# Altium PCB GMAX0505_2518_MB.PcbDoc
Units mm, origin at the board's own origin, x right, y up, seen from the top; angles counter-clockwise.
Board outline 185 x 150 mm, 2 copper layers (Top Layer, Bottom Layer); 120 components, 45 nets, 510 pads, 505 vias.
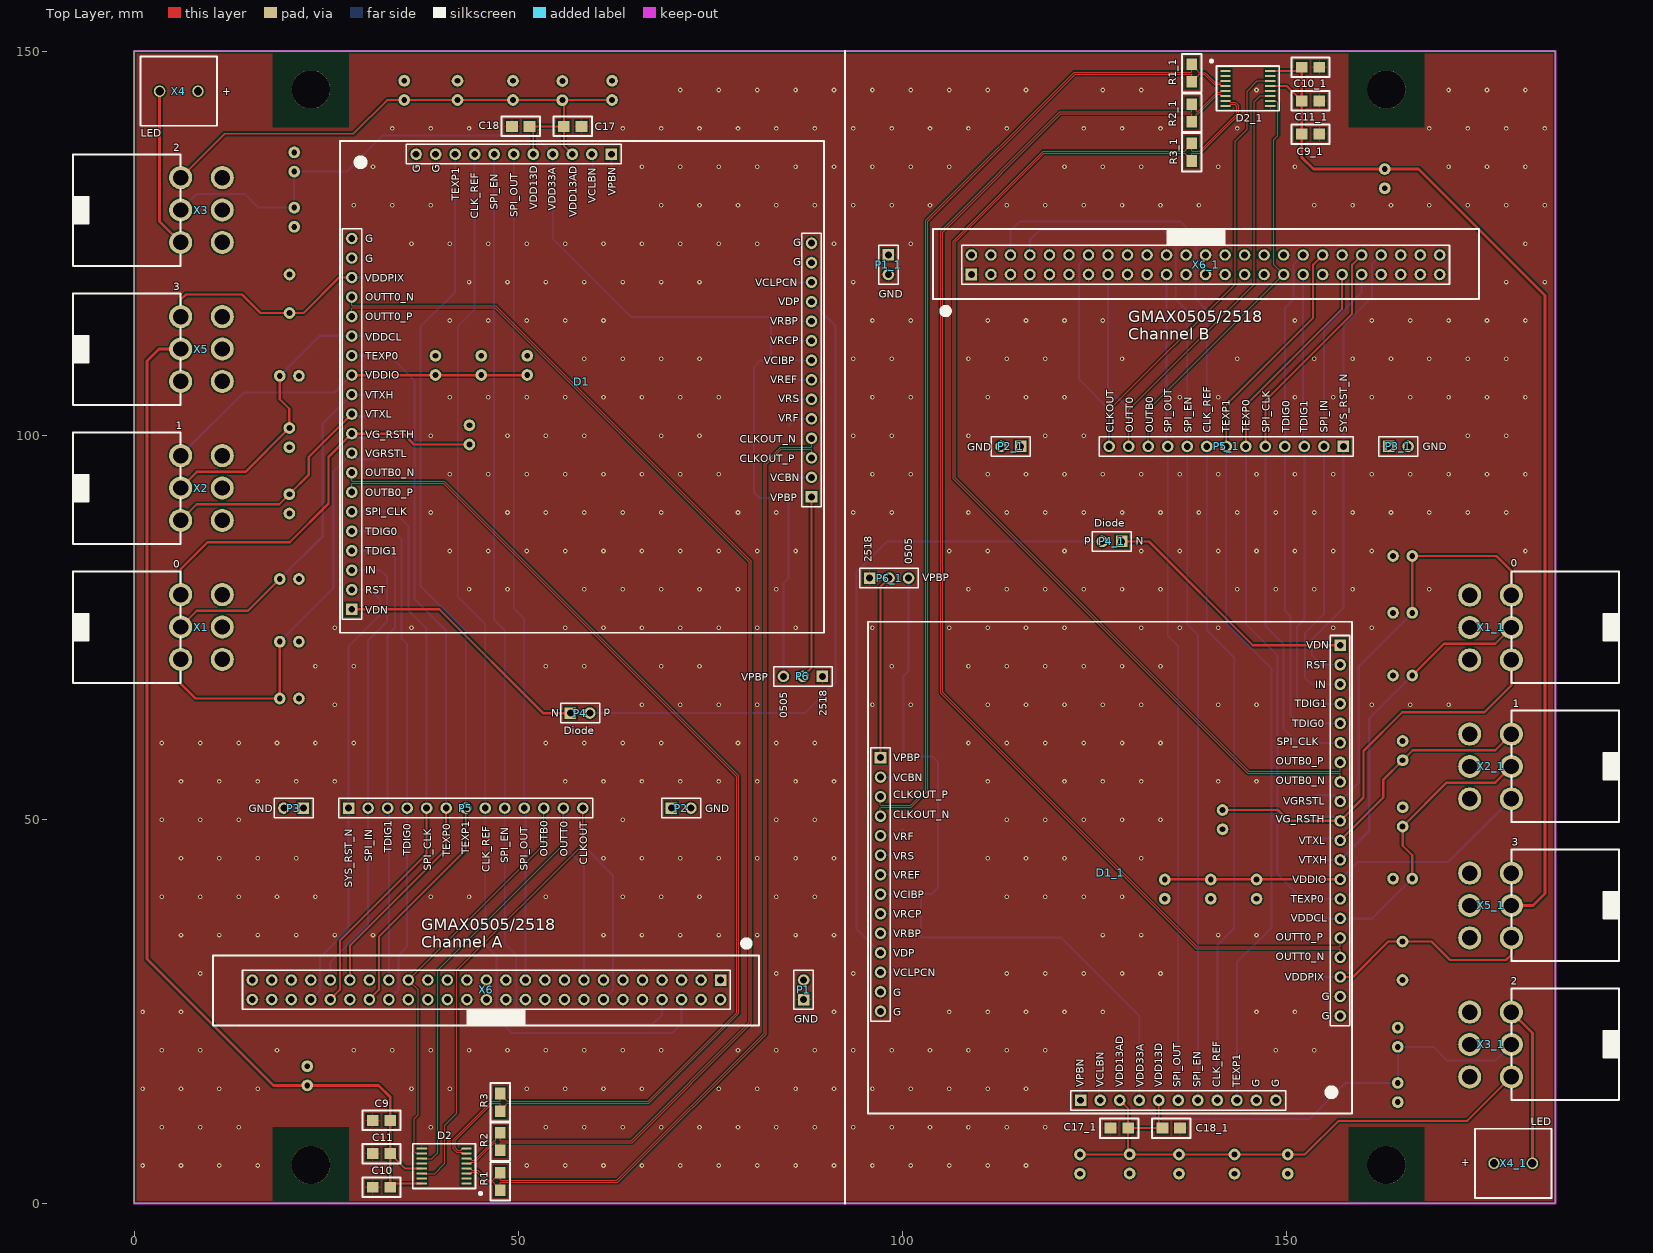
[diagram p0: Top Layer view]
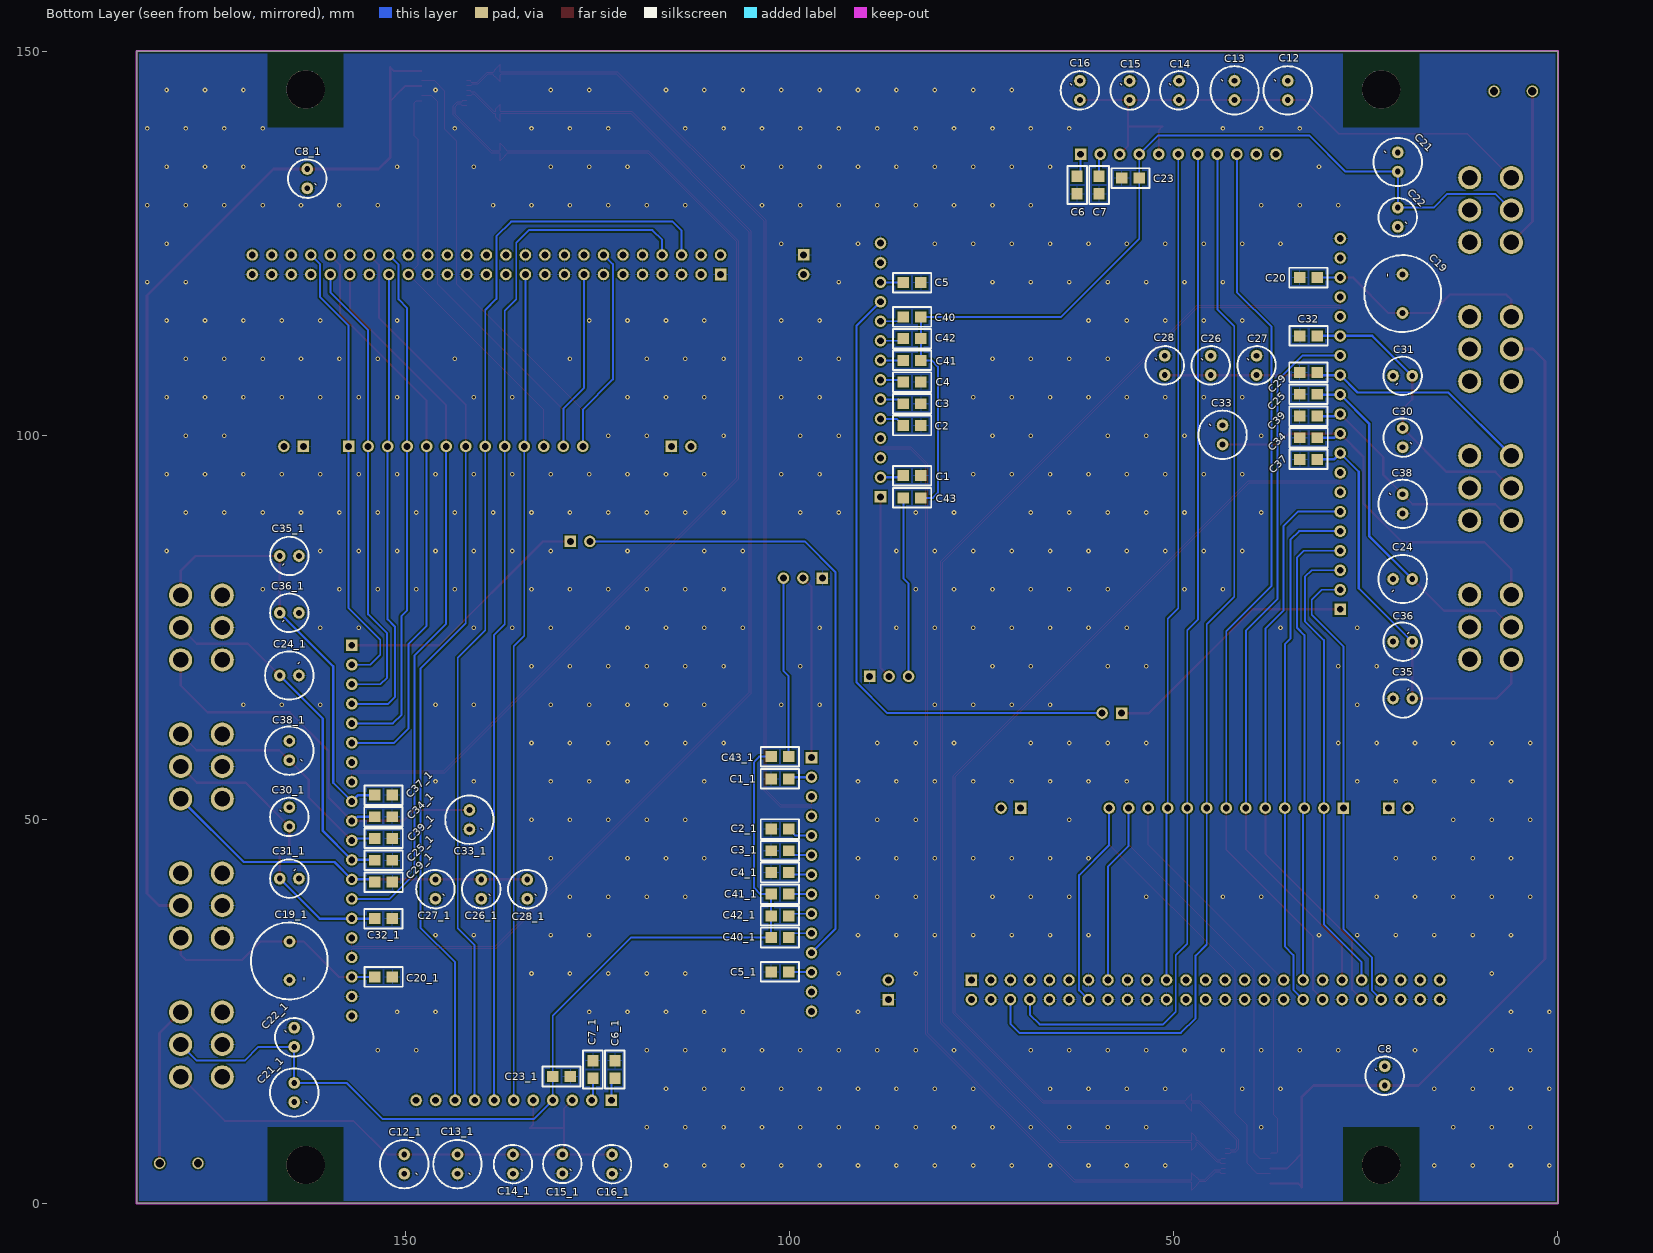
[diagram p1: Bottom Layer view, seen from below]

## Layer stack, top to bottom
Top Solder: solder mask 0.0102, Solder Resist, Dk 3.5
Top Layer: signal copper 0.0356
Dielectric 1: dielectric 0.32, FR-4, Dk 4.8
Bottom Layer: signal copper 0.0356
Bottom Solder: solder mask 0.0102, Solder Resist, Dk 3.5

## Board outline
0,0 0,150 185,150 185,0

## Design rules (kind name [scope] priority, off if disabled: settings)
BoardOutlineClearance [OnLayer('Multi-Layer')] p1: gap=0.254 ignorepadtopadclearanceinfootprint=FALSE except(0: Arc-SplitContinuation Track-SplitContinuation SMDPad-SplitContinuation THPad-SplitContinuation Via-SplitContinuation Fill-SplitContinuation Poly-SplitContinuation Region-SplitContinuation Text-SplitContinuation; 0.4: Arc-OutlineEdge Track-OutlineEdge SMDPad-OutlineEdge THPad-OutlineEdge Via-OutlineEdge Fill-OutlineEdge Poly-OutlineEdge Region-OutlineEdge Text-OutlineEdge)
Clearance [All] p1: gap=0.125 ignorepadtopadclearanceinfootprint=FALSE except(0.2: Arc-Fill Arc-Poly Track-Fill Track-Poly SMDPad-Fill SMDPad-Poly THPad-Fill THPad-Poly Via-Fill Via-Poly Fill-Fill Fill-Poly Poly-Poly Poly-Region Poly-Text; 0.25: Arc-Hole Track-Hole SMDPad-Hole THPad-Hole Via-Hole Fill-Hole Poly-Hole Region-Hole Text-Hole) // Standart
DiffPairsRouting [All] p1: maxlimit=0.254 minlimit=0.127 mostfreqgap=0.13 toplayer_minwidth=0.127 toplayer_maxwidth=0.381 toplayer_prefwidth=0.37 bottomlayer_minwidth=0.127 bottomlayer_maxwidth=0.381 bottomlayer_prefwidth=0.37 maxuncoupledlength=12.7
HoleSize [All] p1: absolutevalues=TRUE maxlimit=5 minlimit=0.3 maxpercent=80.000 minpercent=20.000
MinimumSolderMaskSliver [All] p1: minsoldermaskwidth=0.1
PlaneClearance "PlaneClearance-1 1/2 Oz" [All] p1: clearance=0.2 // Standart
PlaneConnect "TermalConnect-1 1/2 Oz" [All] p1: planeconnectstyle=Relief reliefexpansion=0.2 reliefentries=4 reliefconductorwidth=0.2 reliefairgap=0.2 // Standart
PolygonConnect "PolygonConnect-1 1/2 Oz" [All] p1: thpad.connectstyle=Relief thpad.reliefconductorwidth=0.15 thpad.reliefentries=4 thpad.polygonreliefangle="90 Angle" thpad.airgapwidth=0.2 smdpad.connectstyle=Relief smdpad.reliefconductorwidth=0.2 smdpad.reliefentries=4 smdpad.polygonreliefangle="90 Angle" smdpad.airgapwidth=0.2 via.connectstyle=Direct via.reliefconductorwidth=0.254 via.reliefentries=4 via.polygonreliefangle="90 Angle" via.airgapwidth=0.254 // Standart
RoutingVias [All] p1: holewidth=0.3 width=1.27 viastyle="Through Hole" minholewidth=0.3 minwidth=0.6 maxholewidth=0.711 maxwidth=1.27
SilkToSilkClearance [All] p1: silktosilkclearance=0
SilkToSolderMaskClearance [IsPad] p1: minsilkscreentomaskgap=0 clearancetoexposedcopper=TRUE
SolderMaskExpansion [All] p1: expansion=0.102 istentingtop=FALSE
UnRoutedNet [All] p1: checkbadconnections=TRUE
Width [All] p1: maxlimit=2.5 minlimit=0.125 preferedwidth=0.37
22 further rules are at their usual default settings.

## Classes and differential pairs
component class Sheet1_GMAX0505_2518_MB: C1 C2 C3 C4 C5 C6 C7 C8 C9 C10 C11 C12 C13 C14 C15 C16 C17 C18 C19 C20 C21 C22 C23 C24 C25 C26 C27 C28 C29 C30 C31 C32 C33 C34 C35 C36 C37 C38 C39 C40 C41 C42 C43 D1 D2 P1 P2 P3 P4 P6 R1 R2 X1 X2 X3 X4 X5 X6
differential pair OUTT0: +OUTT0_P -OUTT0_N
differential pair OUTB0: +OUTB0_P -OUTB0_N
differential pair CLKOUT: +CLKOUT_P -CLKOUT_N

## Components (designator, comment, footprint, x,y, rotation, side; value= is the part's Value field where it differs from the comment)
C1 "0,1 мкФ" CAP_SMALL 86.556,93.472 r180 bottom
C1_1 "0,1 мкФ" CAP_SMALL 98.75,56.532 r0 bottom (schematic designator C1)
C2 "0,1 мкФ" CAP_SMALL 86.556,100 r180 bottom
C2_1 "0,1 мкФ" CAP_SMALL 98.75,50.004 r0 bottom (schematic designator C2)
C3 "0,1 мкФ" CAP_SMALL 86.556,102.824 r180 bottom
C3_1 "0,1 мкФ" CAP_SMALL 98.75,47.18 r0 bottom (schematic designator C3)
C4 "0,1 мкФ" CAP_SMALL 86.556,105.649 r180 bottom
C4_1 "0,1 мкФ" CAP_SMALL 98.75,44.355 r0 bottom (schematic designator C4)
C5 "0,1 мкФ" CAP_SMALL 86.556,118.593 r180 bottom
C5_1 "0,1 мкФ" CAP_SMALL 98.75,31.411 r0 bottom (schematic designator C5)
C6 "0,1 мкФ" CAP_SMALL 63.83,135.07 r270 bottom
C6_1 "0,1 мкФ" CAP_SMALL 121.476,14.934 r90 bottom (schematic designator C6)
C7 "0,1 мкФ" CAP_SMALL 60.985,135.07 r270 bottom
C7_1 "0,1 мкФ" CAP_SMALL 124.321,14.934 r90 bottom (schematic designator C7)
C8 "22 мкФ" Cap_0511_electrolitic 22.53,16.612 r90 bottom
C8_1 "22 мкФ" Cap_0511_electrolitic 162.776,133.392 r270 bottom (schematic designator C8)
C9 "0,1 мкФ" CAP_SMALL 29.675,9.55 r0 top
C9_1 "0,1 мкФ" CAP_SMALL 155.631,140.453 r180 top (schematic designator C9)
C10 "0,01 мкФ" CAP_SMALL 29.675,0.838 r0 top
C10_1 "0,01 мкФ" CAP_SMALL 155.631,149.166 r180 top (schematic designator C10)
C11 "0,01 мкФ" CAP_SMALL 29.675,5.207 r0 top
C11_1 "0,01 мкФ" CAP_SMALL 155.631,144.797 r180 top (schematic designator C11)
C12 "100 мкФ" Cap_0612_electrolitic 35.154,144.882 r90 bottom
C12_1 "100 мкФ" Cap_0612_electrolitic 150.152,5.122 r270 bottom (schematic designator C12)
C13 "100 мкФ" Cap_0612_electrolitic 42.079,144.882 r90 bottom
C13_1 "100 мкФ" Cap_0612_electrolitic 143.227,5.122 r270 bottom (schematic designator C13)
C14 "22 мкФ" Cap_0511_electrolitic 49.301,144.882 r90 bottom
C14_1 "22 мкФ" Cap_0511_electrolitic 136.005,5.122 r270 bottom (schematic designator C14)
C15 "22 мкФ" Cap_0511_electrolitic 55.728,144.862 r90 bottom
C15_1 "22 мкФ" Cap_0511_electrolitic 129.578,5.142 r270 bottom (schematic designator C15)
C16 "22 мкФ" Cap_0511_electrolitic 62.205,144.882 r90 bottom
C16_1 "22 мкФ" Cap_0511_electrolitic 123.101,5.122 r270 bottom (schematic designator C16)
C17 "0,1 мкФ" CAP_SMALL 54.567,138.938 r0 top
C17_1 "0,1 мкФ" CAP_SMALL 130.739,11.066 r180 top (schematic designator C17)
C18 "0,1 мкФ" CAP_SMALL 52.825,141.478 r180 top
C18_1 "0,1 мкФ" CAP_SMALL 132.481,8.526 r0 top (schematic designator C18)
C19 "330 мкФ" Cap_1013_electrolitic 20.218,118.415 r90 bottom
C19_1 "330 мкФ" Cap_1013_electrolitic 165.088,31.589 r270 bottom (schematic designator C19)
C20 "0,1 мкФ" CAP_SMALL 29.954,121.793 r0 bottom
C20_1 "0,1 мкФ" CAP_SMALL 155.352,28.211 r180 bottom (schematic designator C20)
C21 "100 мкФ" Cap_0612_electrolitic 20.828,135.565 r90 bottom
C21_1 "100 мкФ" Cap_0612_electrolitic 164.478,14.439 r270 bottom (schematic designator C21)
C22 "10 мкФ" Cap_0511_electrolitic 20.828,128.372 r270 bottom
C22_1 "10 мкФ" Cap_0511_electrolitic 164.478,21.632 r90 bottom (schematic designator C22)
C23 "0,1 мкФ" CAP_SMALL 53.119,134.747 r0 bottom
C23_1 "0,1 мкФ" CAP_SMALL 132.187,15.257 r180 bottom (schematic designator C23)
C24 "100 мкФ" Cap_0612_electrolitic 20.193,81.28 r0 bottom
C24_1 "100 мкФ" Cap_0612_electrolitic 165.113,68.724 r180 bottom (schematic designator C24)
C25 "0,1 мкФ" CAP_SMALL 29.954,106.604 r0 bottom
C25_1 "0,1 мкФ" CAP_SMALL 155.352,43.4 r180 bottom (schematic designator C25)
C26 "22 мкФ" Cap_0511_electrolitic 45.182,109.093 r90 bottom
C26_1 "22 мкФ" Cap_0511_electrolitic 140.124,40.911 r270 bottom (schematic designator C26)
C27 "22 мкФ" Cap_0511_electrolitic 39.209,109.093 r90 bottom
C27_1 "22 мкФ" Cap_0511_electrolitic 146.097,40.911 r270 bottom (schematic designator C27)
C28 "22 мкФ" Cap_0511_electrolitic 51.156,109.093 r90 bottom
C28_1 "22 мкФ" Cap_0511_electrolitic 134.15,40.911 r270 bottom (schematic designator C28)
C29 "0,1 мкФ" CAP_SMALL 29.954,109.449 r0 bottom
C29_1 "0,1 мкФ" CAP_SMALL 155.352,40.555 r180 bottom (schematic designator C29)
C30 "22 мкФ" Cap_0511_electrolitic 20.193,99.69 r270 bottom
C30_1 "22 мкФ" Cap_0511_electrolitic 165.113,50.314 r90 bottom (schematic designator C30)
C31 "22 мкФ" Cap_0511_electrolitic 20.193,107.721 r0 bottom
C31_1 "22 мкФ" Cap_0511_electrolitic 165.113,42.282 r180 bottom (schematic designator C31)
C32 "0,1 мкФ" CAP_SMALL 34.943,111.658 r180 bottom
C32_1 "0,1 мкФ" CAP_SMALL 150.363,38.345 r0 bottom (schematic designator C32)
C33 "100 мкФ" Cap_0612_electrolitic 43.637,100.045 r90 bottom
C33_1 "100 мкФ" Cap_0612_electrolitic 141.669,49.959 r270 bottom (schematic designator C33)
C34 "0,1 мкФ" CAP_SMALL 29.929,100.94 r0 bottom
C34_1 "0,1 мкФ" CAP_SMALL 155.377,49.064 r180 bottom (schematic designator C34)
C35 "22 мкФ" Cap_0511_electrolitic 20.193,65.723 r180 bottom
C35_1 "22 мкФ" Cap_0511_electrolitic 165.113,84.281 r0 bottom (schematic designator C35)
C36 "22 мкФ" Cap_0511_electrolitic 20.193,73.127 r180 bottom
C36_1 "22 мкФ" Cap_0511_electrolitic 165.113,76.877 r0 bottom (schematic designator C36)
C37 "0,1 мкФ" CAP_SMALL 34.95,95.58 r180 bottom
C37_1 "0,1 мкФ" CAP_SMALL 150.356,54.424 r0 bottom (schematic designator C37)
C38 "100 мкФ" Cap_0612_electrolitic 20.193,91.059 r90 bottom
C38_1 "100 мкФ" Cap_0612_electrolitic 165.113,58.945 r270 bottom (schematic designator C38)
C39 "0,1 мкФ" CAP_SMALL 29.954,103.759 r0 bottom
C39_1 "0,1 мкФ" CAP_SMALL 155.352,46.245 r180 bottom (schematic designator C39)
C40 "0,1 мкФ" CAP_SMALL 86.556,114.122 r180 bottom
C40_1 "0,1 мкФ" CAP_SMALL 98.75,35.882 r0 bottom (schematic designator C40)
C41 "0,1 мкФ" CAP_SMALL 86.556,108.473 r180 bottom
C41_1 "0,1 мкФ" CAP_SMALL 98.75,41.531 r0 bottom (schematic designator C41)
C42 "0,1 мкФ" CAP_SMALL 86.556,111.298 r180 bottom
C42_1 "0,1 мкФ" CAP_SMALL 98.75,38.706 r0 bottom (schematic designator C42)
C43 "0,1 мкФ" CAP_SMALL 86.556,90.576 r180 bottom
C43_1 "0,1 мкФ" CAP_SMALL 98.75,59.427 r0 bottom (schematic designator C43)
D1 "GMAX0505" GMAX0505_MEZ 28.321,77.343 r0 top
D1_1 "GMAX0505" GMAX0505_MEZ 156.985,72.661 r180 top (schematic designator D1)
D2 "SN65LVDS048A" "SN65LVDS048A (4LVDS)" 43.256,2.597 r90 top
D2_1 "SN65LVDS048A" "SN65LVDS048A (4LVDS)" 142.05,147.407 r270 top (schematic designator D2)
P1 "GND" HDR1X2 87.147,26.543 r90 top
P1_1 "GND" HDR1X2 98.159,123.461 r270 top (schematic designator P1)
P2 "GND" HDR1X2 69.926,51.46 r0 top
P2_1 "GND" HDR1X2 115.38,98.543 r180 top (schematic designator P2)
P3 "GND" HDR1X2 22.022,51.46 r180 top
P3_1 "GND" HDR1X2 163.284,98.543 r0 top (schematic designator P3)
P4 "Diode" HDR1X2 56.769,63.83 r0 top
P4_1 "Diode" HDR1X2 128.537,86.174 r180 top (schematic designator P4)
P5 "Header 13" HDR1X13 27.915,51.46 r0 top
P5_1 "Header 13" HDR1X13 157.391,98.543 r180 top (schematic designator P5)
P6 "VPBP" HDR1X3 89.586,68.605 r180 top
P6_1 "VPBP" HDR1X3 95.72,81.398 r0 top (schematic designator P6)
R1 "100" RES 46.406,0.388 r0 top
R1_1 "100" RES 138.9,149.615 r180 top (schematic designator R1)
R2 "100" RES 46.406,5.57 r0 top
R2_1 "100" RES 138.9,144.434 r180 top (schematic designator R2)
R3 "100" RES 48.895,15.639 r180 top
R3_1 "100" RES 136.411,134.365 r0 top (schematic designator R3)
X1 "0" POWER 6.045,79.25 r90 top
X1_1 "0" POWER 179.261,70.754 r270 top (schematic designator X1)
X2 "1" POWER 6.045,97.343 r90 top
X2_1 "1" POWER 179.261,52.66 r270 top (schematic designator X2)
X3 "2" POWER 6.045,133.53 r90 top
X3_1 "2" POWER 179.261,16.474 r270 top (schematic designator X3)
X4 "LED" KLEMMNIK_2 3.302,144.78 r0 top
X4_1 "LED" KLEMMNIK_2 182.004,5.224 r180 top (schematic designator X4)
X5 "3" POWER 6.045,115.437 r90 top
X5_1 "3" POWER 179.261,34.567 r270 top (schematic designator X5)
X6 "IDC_7953" IDC_7953 76.327,29.083 r180 top
X6_1 "IDC_7953" IDC_7953 108.979,120.921 r0 top (schematic designator X6)

## Footprints (in the part's own frame and the unit in brackets; to place one, negate y for a bottom-side part, rotate by r counter-clockwise, add the part's x,y. Pads: shape width x height; smd on the part's side, far side on the other; paste and mask are expansions set on the pad)
Cap_0511_electrolitic [mil]
  round 60 hole 30: 1(-49.21,0) 2(49.21,0)
  silkscreen extent -98,-98 98,98
Cap_0612_electrolitic [mil]
  round 60 hole 30: 1(-49.21,0) 2(49.21,0)
  silkscreen extent -124,-124 124,124
Cap_1013_electrolitic [mil]
  round 60 hole 30: 1(-98.43,0) 2(98.43,0)
  silkscreen extent -196,-198 198,196
CAP_SMALL [mil] "FROM_MAX"
  rect 60x55.98 smd: 1(53.71,50) 2(143.71,50)
  silkscreen extent 1,0 197,100, body extent 20,18 178,82, height 100
GMAX0505_MEZ [mm] "GMAX0505_MEZ"
  rect 1.5x1.5 hole 0.9: 1(0,0) 31(33.782,59.233) 45(59.842,14.63)
  round 1.5 hole 0.9: 2(0,2.54) 3(0,5.08) 4(0,7.62) 5(0,10.16) 6(0,12.7) 7(0,15.24) 8(0,17.78) 9(0,20.32) 10(0,22.86) 11(0,25.4) 12(0,27.94) 13(0,30.48) 14(0,33.02) 15(0,35.56) 16(0,38.1) 17(0,40.64) 18(0,43.18) 19(0,45.72) 20(0,48.26) 21(8.382,59.233) 22(10.922,59.233) 23(13.462,59.233) 24(16.002,59.233) 25(18.542,59.233) 26(21.082,59.233) 27(23.622,59.233) 28(26.162,59.233) 29(28.702,59.233) 30(31.242,59.233) 32(59.842,47.65) 33(59.842,45.11) 34(59.842,42.57) 35(59.842,40.03) 36(59.842,37.49) 37(59.842,34.95) 38(59.842,32.41) 39(59.842,29.87) 40(59.842,27.33) 41(59.842,24.79) 42(59.842,22.25) 43(59.842,19.71) 44(59.842,17.17)
  silkscreen extent -1.55,-3.06 61.45,60.94
HDR1X2 [mm] "Connector; Header; 2 Position"
  rect 1.5x1.5 hole 0.9: 1(0,0)
  round 1.5 hole 0.9: 2(2.54,0)
  silkscreen extent -1.27,-1.27 3.81,1.27
HDR1X3 [mm] "Connector; Header; 3 Position"
  rect 1.5x1.5 hole 0.9: 1(0,0)
  round 1.5 hole 0.9: 2(2.54,0) 3(5.08,0)
  silkscreen extent -1.27,-1.27 6.35,1.27
HDR1X13 [mm] "Connector; Header; 13 Position"
  rect 1.5x1.5 hole 0.9: 1(0,0)
  round 1.5 hole 0.9: 2(2.54,0) 3(5.08,0) 4(7.62,0) 5(10.16,0) 6(12.7,0) 7(15.24,0) 8(17.78,0) 9(20.32,0) 10(22.86,0) 11(25.4,0) 12(27.94,0) 13(30.48,0)
  silkscreen extent -1.27,-1.27 31.75,1.27
IDC_7953 [mm]
  rect 1.5x1.5 hole 0.9: 1(0,0)
  round 1.5 hole 0.9: 2(0,2.54) 3(2.54,0) 4(2.54,2.54) 5(5.08,0) 6(5.08,2.54) 7(7.62,0) 8(7.62,2.54) 9(10.16,0) 10(10.16,2.54) 11(12.7,0) 12(12.7,2.54) 13(15.24,0) 14(15.24,2.54) 15(17.78,0) 16(17.78,2.54) 17(20.32,0) 18(20.32,2.54) 19(22.86,0) 20(22.86,2.54) 21(25.4,0) 22(25.4,2.54) 23(27.94,0) 24(27.94,2.54) 25(30.48,0) 26(30.48,2.54) 27(33.02,0) 28(33.02,2.54) 29(35.56,0) 30(35.56,2.54) 31(38.1,0) 32(38.1,2.54) 33(40.64,0) 34(40.64,2.54) 35(43.18,0) 36(43.18,2.54) 37(45.72,0) 38(45.72,2.54) 39(48.26,0) 40(48.26,2.54) 41(50.8,0) 42(50.8,2.54) 43(53.34,0) 44(53.34,2.54) 45(55.88,0) 46(55.88,2.54) 47(58.42,0) 48(58.42,2.54) 49(60.96,0) 50(60.96,2.54)
  silkscreen extent -5.03,-5.14 66.07,5.92
KLEMMNIK_2 [mm]
  round 1.5 hole 1.1: 1(0,0) 2(5,0)
  silkscreen extent -2.5,-4.5 7.5,4.5
POWER [mm] "POWER"
  round 3 hole 2: 1(0,0) 2(-4.217,0) 3(-8.435,0) 4(-8.435,-5.422) 5(-4.217,-5.422) 6(0,-5.422)
  silkscreen extent -11.5,0 3,14
RES [mil] "FROM_MAX"
  rect 55.98x60 smd: 1(49,52.71) 2(49,142.71)
  silkscreen extent -1,0 99,196, body extent 17,19 81,177, height 100
"SN65LVDS048A (4LVDS)" [mm]
  rect 0.28x1.35 smd: 1(0,0) 2(0.65,0) 3(1.3,0) 4(1.95,0) 5(2.6,0) 6(3.25,0) 7(3.9,0) 8(4.55,0) 9(4.55,5.85) 10(3.9,5.85) 11(3.25,5.85) 12(2.6,5.85) 13(1.95,5.85) 14(1.3,5.85) 15(0.65,5.85) 16(0,5.85)
  silkscreen extent -1.49,-2.03 5.18,7

## Part data
C1 C1_1 C2 C2_1 C3 C3_1 C4 C4_1 C5 C5_1 C6 C6_1 C7 C7_1 C9 C9_1 C10 C10_1 C11 C11_1 C17 C17_1 C18 C18_1 C20 C20_1 C23 C23_1 C25 C25_1 C29 C29_1 C32 C32_1 C34 C34_1 C37 C37_1 C39 C39_1 C40 C40_1 C41 C41_1 C42 C42_1 C43 C43_1: library part CAP_SMALL
C8 C8_1 C14 C14_1 C15 C15_1 C16 C16_1 C22 C22_1 C26 C26_1 C27 C27_1 C28 C28_1 C30 C30_1 C31 C31_1 C35 C35_1 C36 C36_1: library part Cap_electrolotoc_0511
C12 C12_1 C13 C13_1 C21 C21_1 C24 C24_1 C33 C33_1 C38 C38_1: library part Cap_electrolotoc_0612
C19 C19_1: library part Cap_electrolotoc_1013
D1 D1_1: library part GMAX0505_MEZ
D2 D2_1: library part "SN65LVDS048A (4LVDS)"
P1 P1_1 P2 P2_1 P3 P3_1 P4 P4_1: library part "Header 2", "Header, 2-Pin", LatestRevisionDate=17-Jul-2002, LatestRevisionNote="Re-released for DXP Platform.", Publisher="Altium Limited"
P5 P5_1: "Header, 13-Pin", LatestRevisionDate=17-Jul-2002, LatestRevisionNote="Re-released for DXP Platform.", Publisher="Altium Limited"
P6 P6_1: library part "Header 3", "Header, 3-Pin", LatestRevisionDate=17-Jul-2002, LatestRevisionNote="Re-released for DXP Platform.", Publisher="Altium Limited"
R1 R1_1 R2 R2_1 R3 R3_1: library part RES
X1 X1_1 X2 X2_1 X3 X3_1 X5 X5_1: library part POWER
X4 X4_1: library part KLEMMNIK_2

## Free pads (board coordinates)
  round 5 hole 5 unplated: H(23,5) H(23,145) H(163,5) H(163,145)

## Via types
v1: diameter 0.6, hole 0.3, Top Layer to Bottom Layer, 505 vias

## Nets (pads, with @x,y where several pads share a name; then routed paths per layer and width w, separated by ;. In a path a pad name is that pad's centre, name@x,y a point inside that pad or via, vN(x,y) a via of type N, cw(c..) or ccw(c..) an arc to the next point about the centre after c; other vN are vias at no path point)
3,3V_LVDS: C8.1 C9.2 C10.2 C11.2 D2.13 D2.16 X5.2 | length 142.9
  Top Layer w0.254: C10.2 33.813,2.597 D2.16 ; C11.2 33.376,6.477 33.96,5.893 33.96,5.842 35.255,4.547 D2.13
  Top Layer w0.37: X5.2 3.244,111.219 1.676,109.652 1.676,31.826 18.141,15.362 C8.1 31.806,15.362 33.325,13.843 C9.2 C11.2 C10.2
CLK_REF: D1.24 P5.8 X6.6 | length 144
  Bottom Layer w0.254: D1.24 44.323,116.408 42.113,114.198 42.113,85.369 42.113,78.994 45.695,75.413 P5.8 45.695,33.706 47.142,32.258 47.142,24.13 49.073,22.2 70.079,22.2 71.247,23.368 X6.6
CLKOUT: D2.14 P5.13 X6.14 | length 84.3
  Top Layer w0.127: D2.14 39.101,3.897 40.437,5.232 40.437,10.185 42.012,11.76 42.012,30.328 58.395,46.711 P5.13
  Bottom Layer w0.254: P5.13 58.395,46.66 62.306,42.748 62.306,27.737 X6.14@61.1,26.53
CLKOUT_N: D1.42 D2.4 R1.2 | length 131
  Top Layer w0.127: D2.4 43.791,4.547 43.868,4.47 43.868,4.424 43.942,4.35 44.697,4.35 45.996,3.051 46.688,3.051 46.952,3.315 47.003,3.315 R1.2@47.65,3.962 ; R1.2 R1.2@47.65,3.962 ; D1.42 88.163,98.526 88.089,98.452 84.144,98.452 81.988,96.296 81.988,22.146 62.841,2.999 47.725,2.999 47.65,3.073 R1.2@47.65,3.962
CLKOUT_P: D1.43 D2.3 R1.1 | length 131.1
  Top Layer w0.127: D2.3 43.791,3.897 43.868,3.973 43.868,4.019 43.942,4.093 44.591,4.093 45.89,2.794 46.66,2.794 47.003,2.451 47.003,2.375 R1.1 47.65,2.667 47.725,2.742 62.948,2.742 82.245,22.039 82.245,96.19 84.25,98.195 88.089,98.195 88.163,98.121 D1.43
GND: C1.2 C1_1.2 C2.2 C2_1.2 C3.2 C3_1.2 C4.2 C4_1.2 C5.2 C5_1.2 C6.2 C6_1.2 C7.2 C7_1.2 C8.2 C8_1.2 C9.1 C9_1.1 C10.1 C10_1.1 C11.1 C11_1.1 C12.2 C12_1.2 C13.2 C13_1.2 C14.2 C14_1.2 C15.2 C15_1.2 C16.2 C16_1.2 C17.2 C17_1.2 C18.2 C18_1.2 C19.2 C19_1.2 C20.2 C20_1.2 C21.2 C21_1.2 C22.2 C22_1.2 C23.2 C23_1.2 C24.2 C24_1.2 C25.2 C25_1.2 C26.2 C26_1.2 C27.2 C27_1.2 C28.2 C28_1.2 C29.2 C29_1.2 C30.2 C30_1.2 C31.2 C31_1.2 C32.1 C32_1.1 C33.2 C33_1.2 C34.2 C34_1.2 C35.1 C35_1.1 C36.1 C36_1.1 C37.1 C37_1.1 C38.1 C38_1.1 C39.2 C39_1.2 D1.19 D1.20 D1.21 D1.22 D1.32 D1.33 D1_1.19 D1_1.20 D1_1.21 D1_1.22 D1_1.32 D1_1.33 D2.9 D2.12 D2_1.9 D2_1.12 P1.1 P1.2 P1_1.1 P1_1.2 P2.1 P2.2 P2_1.1 P2_1.2 P3.1 P3.2 P3_1.1 P3_1.2 P6.1 P6_1.1 X1.4 X1.5 X1.6 X1_1.4 X1_1.5 X1_1.6 X2.4 X2.5 X2.6 X2_1.4 X2_1.5 X2_1.6 X3.4 X3.5 X3.6 X3_1.4 X3_1.5 X3_1.6 X4.2 X4_1.2 X5.4 X5.5 X5.6 X5_1.4 X5_1.5 X5_1.6 X6.1 X6.4 X6.5 X6.7 X6.9 X6.10 X6.11 X6.12 X6.13 X6.16 X6.17 X6.18 X6.19 X6.20 X6.22 X6.23 X6.24 X6.25 X6.26 X6.27 X6.28 X6.29 X6.30 X6.31 X6.32 X6.34 X6.37 X6.40 X6.43 X6.45 X6.46 X6.47 X6.48 X6.49 X6.50 X6_1.1 X6_1.4 X6_1.5 X6_1.7 X6_1.9 X6_1.10 X6_1.11 X6_1.12 X6_1.13 X6_1.16 X6_1.17 X6_1.18 X6_1.19 X6_1.20 X6_1.22 X6_1.23 X6_1.24 X6_1.25 X6_1.26 X6_1.27 X6_1.28 X6_1.29 X6_1.30 X6_1.31 X6_1.32 X6_1.34 X6_1.37 X6_1.40 X6_1.43 X6_1.45 X6_1.46 X6_1.47 X6_1.48 X6_1.49 X6_1.50
  other v1: 1.09,4.933 6.09,4.933 11.09,4.933 16.09,4.933 51.09,4.933 56.09,4.933 61.09,4.933 66.09,4.933 71.09,4.933 76.09,4.933 81.09,4.933 86.09,4.933 91.09,4.933 96.09,4.933 101.09,4.933 106.09,4.933 111.09,4.933 116.09,4.933 3.59,9.933 8.59,9.933 13.59,9.933 38.59,9.933 53.59,9.933 58.59,9.933 63.59,9.933 68.59,9.933 73.59,9.933 78.59,9.933 83.59,9.933 88.59,9.933 93.59,9.933 98.59,9.933 103.59,9.933 108.59,9.933 113.59,9.933 118.59,9.933 1.09,14.933 6.09,14.933 11.09,14.933 16.09,14.933 36.09,14.933 41.09,14.933 51.09,14.933 56.09,14.933 61.09,14.933 66.09,14.933 76.09,14.933 81.09,14.933 86.09,14.933 91.09,14.933 96.09,14.933 101.09,14.933 106.09,14.933 111.09,14.933 116.09,14.933 3.59,19.933 8.59,19.933 18.59,19.933 28.59,19.933 33.59,19.933 38.59,19.933 43.59,19.933 48.59,19.933 53.59,19.933 58.59,19.933 63.59,19.933 68.59,19.933 78.59,19.933 83.59,19.933 88.59,19.933 93.59,19.933 98.59,19.933 103.59,19.933 108.59,19.933 113.59,19.933 118.59,19.933 148.59,19.933 153.59,19.933 1.09,24.933 6.09,24.933 91.09,24.933 106.09,24.933 111.09,24.933 116.09,24.933 121.09,24.933 126.09,24.933 146.09,24.933 151.09,24.933 8.59,29.933 83.59,29.933 93.59,29.933 113.59,29.933 118.59,29.933 123.59,29.933 128.59,29.933 133.59,29.933 6.09,34.933 11.09,34.933 16.09,34.933 21.09,34.933 26.09,34.933 31.09,34.933 61.09,34.933 66.09,34.933 71.09,34.933 76.09,34.933 81.09,34.933 86.09,34.933 91.09,34.933 126.09,34.933 131.09,34.933 141.09,34.933 146.09,34.933 3.59,39.933 8.59,39.933 13.59,39.933 18.59,39.933 23.59,39.933 38.59,39.933 43.59,39.933 53.59,39.933 63.59,39.933 68.59,39.933 73.59,39.933 83.59,39.933 88.59,39.933 113.59,39.933 118.59,39.933 123.59,39.933 128.59,39.933 6.09,44.933 11.09,44.933 16.09,44.933 21.09,44.933 61.09,44.933 66.09,44.933 71.09,44.933 76.09,44.933 81.09,44.933 86.09,44.933 91.09,44.933 111.09,44.933 116.09,44.933 121.09,44.933 131.09,44.933 3.59,49.933 8.59,49.933 13.59,49.933 63.59,49.933 83.59,49.933 88.59,49.933 113.59,49.933 118.59,49.933 123.59,49.933 128.59,49.933 133.59,49.933 6.09,54.933 11.09,54.933 16.09,54.933 21.09,54.933 26.09,54.933 56.09,54.933 61.09,54.933 66.09,54.933 71.09,54.933 76.09,54.933 81.09,54.933 86.09,54.933 91.09,54.933 111.09,54.933 121.09,54.933 126.09,54.933 131.09,54.933 141.09,54.933 146.09,54.933 3.59,59.933 8.59,59.933 13.59,59.933 18.59,59.933 23.59,59.933 28.59,59.933 53.59,59.933 58.59,59.933 63.59,59.933 68.59,59.933 78.59,59.933 83.59,59.933 88.59,59.933 108.59,59.933 113.59,59.933 118.59,59.933 123.59,59.933 128.59,59.933 133.59,59.933 26.09,64.933 66.09,64.933 71.09,64.933 76.09,64.933 81.09,64.933 96.09,64.933 101.09,64.933 111.09,64.933 116.09,64.933 121.09,64.933 126.09,64.933 131.09,64.933 141.09,64.933 146.09,64.933 161.09,64.933 166.09,64.933 171.09,64.933 23.59,69.933 28.59,69.933 53.59,69.933 58.59,69.933 68.59,69.933 73.59,69.933 98.59,69.933 108.59,69.933 113.59,69.933 118.59,69.933 123.59,69.933 128.59,69.933 133.59,69.933 26.09,74.933 36.09,74.933 56.09,74.933 61.09,74.933 66.09,74.933 71.09,74.933 76.09,74.933 81.09,74.933 86.09,74.933 96.09,74.933 106.09,74.933 111.09,74.933 116.09,74.933 121.09,74.933 131.09,74.933 136.09,74.933 141.09,74.933 156.09,74.933 161.09,74.933 43.59,79.933 48.59,79.933 58.59,79.933 63.59,79.933 68.59,79.933 73.59,79.933 78.59,79.933 83.59,79.933 108.59,79.933 113.59,79.933 118.59,79.933 123.59,79.933 128.59,79.933 133.59,79.933 143.59,79.933 148.59,79.933 153.59,79.933 158.59,79.933 168.59,79.933 41.09,84.933 46.09,84.933 51.09,84.933 56.09,84.933 61.09,84.933 66.09,84.933 71.09,84.933 76.09,84.933 81.09,84.933 86.09,84.933 106.09,84.933 111.09,84.933 121.09,84.933 131.09,84.933 136.09,84.933 141.09,84.933 146.09,84.933 151.09,84.933 156.09,84.933 161.09,84.933 181.09,84.933 38.59,89.933 48.59,89.933 53.59,89.933 58.59,89.933 63.59,89.933 68.59,89.933 78.59,89.933 83.59,89.933 93.59,89.933 98.59,89.933 108.59,89.933 113.59,89.933 118.59,89.933 123.59,89.933 128.59,89.933 133.59,89.933 138.59,89.933 143.59,89.933 148.59,89.933 153.59,89.933 158.59,89.933 163.59,89.933 168.59,89.933 173.59,89.933 178.59,89.933 41.09,94.933 46.09,94.933 51.09,94.933 56.09,94.933 61.09,94.933 66.09,94.933 71.09,94.933 76.09,94.933 96.09,94.933 101.09,94.933 111.09,94.933 116.09,94.933 121.09,94.933 126.09,94.933 131.09,94.933 136.09,94.933 141.09,94.933 146.09,94.933 151.09,94.933 156.09,94.933 161.09,94.933 166.09,94.933 171.09,94.933 176.09,94.933 181.09,94.933 38.59,99.933 48.59,99.933 53.59,99.933 58.59,99.933 68.59,99.933 73.59,99.933 93.59,99.933 98.59,99.933 108.59,99.933 118.59,99.933 123.59,99.933 173.59,99.933 178.59,99.933 41.09,104.933 46.09,104.933 51.09,104.933 56.09,104.933 61.09,104.933 66.09,104.933 71.09,104.933 76.09,104.933 96.09,104.933 101.09,104.933 111.09,104.933 116.09,104.933 121.09,104.933 136.09,104.933 141.09,104.933 151.09,104.933 156.09,104.933 161.09,104.933 166.09,104.933 171.09,104.933 176.09,104.933 181.09,104.933 58.59,109.933 63.59,109.933 68.59,109.933 73.59,109.933 93.59,109.933 98.59,109.933 108.59,109.933 113.59,109.933 118.59,109.933 128.59,109.933 143.59,109.933 153.59,109.933 158.59,109.933 163.59,109.933 168.59,109.933 173.59,109.933 178.59,109.933 41.09,114.933 46.09,114.933 51.09,114.933 56.09,114.933 61.09,114.933 96.09,114.933 101.09,114.933 111.09,114.933 116.09,114.933 121.09,114.933 126.09,114.933 151.09,114.933 161.09,114.933 166.09,114.933 171.09,114.933 176.09,114.933 181.09,114.933 43.59,119.933 48.59,119.933 53.59,119.933 58.59,119.933 63.59,119.933 68.59,119.933 73.59,119.933 93.59,119.933 178.59,119.933 183.59,119.933 36.09,124.933 41.09,124.933 46.09,124.933 51.09,124.933 56.09,124.933 61.09,124.933 66.09,124.933 71.09,124.933 76.09,124.933 81.09,124.933 91.09,124.933 101.09,124.933 181.09,124.933 28.59,129.933 33.59,129.933 38.59,129.933 68.59,129.933 73.59,129.933 78.59,129.933 83.59,129.933 88.59,129.933 93.59,129.933 98.59,129.933 103.59,129.933 113.59,129.933 118.59,129.933 123.59,129.933 128.59,129.933 133.59,129.933 138.59,129.933 153.59,129.933 158.59,129.933 163.59,129.933 168.59,129.933 173.59,129.933 178.59,129.933 183.59,129.933 31.09,134.933 66.09,134.933 71.09,134.933 76.09,134.933 81.09,134.933 86.09,134.933 91.09,134.933 96.09,134.933 101.09,134.933 106.09,134.933 121.09,134.933 126.09,134.933 131.09,134.933 141.09,134.933 151.09,134.933 171.09,134.933 176.09,134.933 181.09,134.933 33.59,139.933 38.59,139.933 43.59,139.933 63.59,139.933 68.59,139.933 73.59,139.933 78.59,139.933 83.59,139.933 88.59,139.933 93.59,139.933 98.59,139.933 103.59,139.933 108.59,139.933 113.59,139.933 123.59,139.933 128.59,139.933 133.59,139.933 143.59,139.933 168.59,139.933 173.59,139.933 178.59,139.933 183.59,139.933 71.09,144.933 76.09,144.933 81.09,144.933 86.09,144.933 91.09,144.933 96.09,144.933 101.09,144.933 106.09,144.933 111.09,144.933 116.09,144.933 126.09,144.933 131.09,144.933 146.09,144.933 171.09,144.933 176.09,144.933 181.09,144.933
NetC43_1: C43.1 P6.3 | length 23.5
  Bottom Layer w0.254: P6.3 84.506,80.67 85.192,81.356 C43.1
NetX3_3: X3.3 X4.1 | length 20.8
  Top Layer w0.37: X4.1 3.302,127.838 X3.3
OUTB0: D2.10 P5.11 X6.33 | length 53.9
  Top Layer w0.127: D2.10 37.365,6.538 36.617,6.538 36.424,6.731 36.424,10.998 36.957,11.532 36.957,27.813 X6.33 53.315,46.711 P5.11
OUTB0_N: D1.8 D2.8 R3.2 | length 146.1
  Top Layer w0.127: D1.8 28.321,94.056 28.395,93.981 40.363,93.981 78.692,55.653 78.692,24.735 66.988,13.03 48.585,13.03 48.298,12.743 48.298,12.662 R3.2 47.65,12.954 47.576,13.029 46.615,13.029 41.786,8.199 41.786,7.244 42.08,6.95 42.57,6.95 42.645,7.024 42.645,7.07 42.721,7.147 D2.8
OUTB0_P: D1.7 D2.7 R3.1 | length 146.1
  Top Layer w0.127: D1.7 28.321,93.65 28.395,93.724 40.257,93.724 78.435,55.546 78.435,24.841 66.881,13.287 48.585,13.287 48.298,13.574 48.298,13.653 R3.1 47.65,13.36 47.576,13.286 46.509,13.286 41.529,8.306 41.529,7.137 41.973,6.693 42.57,6.693 42.645,6.619 42.645,6.573 42.721,6.497 D2.7
OUTT0: D2.11 P5.12 X6.15 | length 77.5
  Top Layer w0.127: D2.11 38.74,5.847 39.497,6.604 39.497,30.353 55.855,46.711 P5.12
  Bottom Layer w0.254: P5.12 55.855,46.584 58.547,43.891 X6.15
OUTT0_N: D1.17 D2.5 R2.1 | length 173.3
  Top Layer w0.127: D1.17 28.321,116.916 28.395,116.841 47.069,116.841 80.343,83.567 80.343,23.465 64.8,7.922 48.348,7.922 48.347,7.923 47.725,7.923 47.65,7.849 R2.1 47.055,7.504 47.055,7.849 46.981,7.923 46.876,7.923 44.345,5.393 43.942,5.393 43.868,5.319 43.868,5.273 43.791,5.197 D2.5
OUTT0_P: D1.16 D2.6 R2.2 | length 172.4
  Top Layer w0.127: D1.16 28.321,116.51 28.395,116.584 46.962,116.584 80.086,83.461 80.086,23.571 64.694,8.179 48.455,8.179 48.453,8.18 47.725,8.18 47.65,8.255 R2.2 47.055,8.6 47.055,8.255 46.981,8.18 46.769,8.18 44.239,5.65 43.942,5.65 43.868,5.724 43.868,5.77 43.791,5.847 D2.6
SPI_CLK: D1.6 P5.5 X6.42 | length 76.1
  Top Layer w0.254: X6.42@25.442,26.458 26.772,27.788 26.772,34.214 38.075,45.517 P5.5
  Bottom Layer w0.254: D1.6 33.833,90.043 35.712,88.163 35.712,77.165 38.075,74.803 P5.5
SPI_EN: D1.25 P5.9 X6.8 | length 135
  Bottom Layer w0.254: D1.25 46.863,85.369 46.863,75.997 48.235,74.625 P5.9 48.235,33.807 49.733,32.309 49.733,24.943 51.359,23.317 67.437,23.317 68.707,24.587 X6.8
SPI_IN: D1.3 P5.2 X6.41 | length 60.5
  Bottom Layer w0.254: X6.41 25.527,31.394 30.455,36.322 P5.2 30.455,73.33 32.918,75.794 32.918,81.559 32.055,82.423 D1.3
SPI_OUT: D1.26 P5.10 X6.21 | length 108.1
  Bottom Layer w0.254: D1.26 49.403,85.369 49.403,77.495 50.775,76.124 P5.10 50.927,51.308 X6.21
SYS_RST_N: D1.2 P5.1 X6.44 | length 60
  Bottom Layer w0.254: X6.44 24.206,27.762 24.206,32.029 27.915,35.738 P5.1 27.915,72.517 32.029,76.632 32.029,78.588 30.734,79.883 D1.2
TDIG0: D1.5 P5.4 X6.36 | length 68.3
  Bottom Layer w0.254: D1.5 33.68,87.503 34.798,86.385 34.798,73.508 35.535,72.771 P5.4 35.535,33.452 34.417,32.334 34.417,27.813 X6.36@32.987,26.383
TDIG1: D1.4 P5.3 X6.35 | length 61.4
  Bottom Layer w0.254: D1.4 33.071,84.963 33.934,84.099 33.934,74.905 32.995,73.965 P5.3 33.147,51.308 X6.35
TEXP0: D1.14 P5.6 X6.39 | length 94.7
  Top Layer w0.254: X6.39 28.067,33.528 40.615,46.076 P5.6
  Bottom Layer w0.254: D1.14 33.249,110.363 36.5,107.112 36.5,78.664 40.615,74.549 P5.6 P5.6@40.615,51.218
TEXP1: D1.23 P5.7 X6.38 | length 119.9
  Top Layer w0.254: X6.38@30.377,26.313 31.852,27.788 31.852,34.722 43.155,46.025 P5.7
  Bottom Layer w0.254: D1.23 41.783,118.618 37.262,114.097 37.262,85.369 37.262,80.391 43.155,74.498 P5.7
VCBN: C1.1 D1.44 | length 3.1
  Bottom Layer w0.305: C1.1 85.42,94.513 D1.44
VCIBP: C41.1 D1.38 | length 3
  Bottom Layer w0.254: C41.1 88.153,109.743 D1.38
VCLBN: C7.1 D1.30 | length 2.9
  Bottom Layer w0.254: D1.30 59.715,136.423 C7.1
VCLPCN: C5.1 D1.34 | length 3
  Bottom Layer w0.254: C5.1 88.113,119.863 D1.34
VDD13: C12.1 C13.1 C14.1 C15.1 C16.1 C17.1 C18.1 D1.27 D1.29 X3.1 | length 76.2
  Top Layer w0.254: X3.1 11.758,139.243 28.524,139.243 32.913,143.632 C12.1 C13.1 C14.1 C16.1 ; D1.27 51.943,139.725 C18.1 C17.1 ; C15.1 55.931,143.408 C17.1 ; D1.29 55.931,137.668 C17.1
VDD33A: C21.1 C22.1 C23.1 C40.2 C41.2 C42.2 C43.2 D1.28 X3.2 | length 128.4
  Bottom Layer w0.254: X3.2 8.152,131.42 14.376,131.42 16.174,129.622 C22.1 C21.1 27.635,134.315 32.309,138.989 52.07,138.989 D1.28 C23.1 54.483,125.552 64.643,115.392 C40.2 C42.2 C41.2 81.498,109.743 80.696,108.941 80.696,92.507 81.356,91.846 C43.2
VDDCL: C30.1 C31.1 C32.2 D1.15 X2.2 | length 39.2
  Top Layer w0.305: X2.2 8.144,95.225 14.478,95.225 C30.1 20.193,103.44 18.943,104.69 C31.1
  Bottom Layer w0.305: C31.1 24.15,112.928 C32.2
VDDIO: C26.1 C27.1 C28.1 C29.1 D1.13 X2.1 | length 52.6
  Top Layer w0.305: D1.13 51.136,107.823 C28.1
  Bottom Layer w0.305: X2.1 14.264,105.562 26.06,105.562 D1.13 30.963,107.823 C29.1
VDDPIX: C19.1 C20.1 D1.18 X5.1 | length 30.6
  Top Layer w0.305: X5.1 6.045,117.627 6.731,118.313 14.046,118.313 16.445,115.915 C19.1 22.062,115.915 26.67,120.523 D1.18
  Bottom Layer w0.305: D1.18 C20.1
VDN: D1.1 P4.1 | length 34
  Top Layer w0.305: D1.1 39.7,77.343 53.213,63.83 P4.1
VDP: D1.35 P4.2 | length 84.5
  Bottom Layer w0.254: P4.2 87.3,63.83 91.288,67.818 91.288,114.249 D1.35
VG_RSTH: C33.1 C34.1 D1.10 X1.1 | length 55.5
  Top Layer w0.305: X1.1 6.045,82.55 9.55,86.055 20.244,86.055 25.298,91.11 25.298,97.18 D1.10 35.027,100.203 36.434,98.795 C33.1
  Bottom Layer w0.305: D1.10 28.564,100.203 29.097,99.67 C34.1
VGRSTL: C35.2 C36.2 C37.2 D1.9 X1.3 | length 56
  Top Layer w0.305: X1.3 6.045,67.666 7.988,65.723 C35.2 C36.2
  Bottom Layer w0.305: C36.2 25.908,80.092 25.908,95.25 D1.9 29.134,96.85 C37.2
VPBN: C6.1 D1.31 | length 3.1
  Bottom Layer w0.254: D1.31 62.103,134.163 C6.1
VPBP: D1.45 P6.2 | length 24
  Top Layer w0.305: P6.2 88.163,69.723 D1.45
  Bottom Layer w0.305: D1.45@88.036,91.846 D1.45
VRBP: C40.1 D1.36 | length 3.2
  Bottom Layer w0.254: C40.1 85.75,114.833 D1.36
VRCP: C42.1 D1.37 | length 3.1
  Bottom Layer w0.254: C42.1 85.466,112.293 D1.37
VREF: C4.1 D1.39 | length 3.1
  Bottom Layer w0.254: C4.1 85.486,107.213 D1.39
VRF: C2.1 D1.41 | length 3.4
  Bottom Layer w0.254: C2.1 85.243,101.27 85.827,101.854 85.827,101.905 86.055,102.133 D1.41
VRS: C3.1 D1.40 | length 3.2
  Bottom Layer w0.254: C3.1 85.771,104.673 D1.40
VTXH: C24.1 C25.1 D1.12 X1.2 | length 46.4
  Top Layer w0.305: X1.2 8.152,77.14 14.803,77.14 C24.1
  Bottom Layer w0.305: C24.1 24.562,86.899 24.562,101.524 D1.12 31.267,105.283 C25.1
VTXL: C38.2 C39.1 D1.11 X2.3 | length 32.5
  Top Layer w0.305: X2.3 8.145,91.008 18.892,91.008 C38.2 22.708,94.824 22.708,97.13 D1.11
  Bottom Layer w0.305: D1.11 28.55,102.514 29.072,102.514 29.097,102.489 C39.1
pads on no net: C1_1.1 C2_1.1 C3_1.1 C4_1.1 C5_1.1 C6_1.1 C7_1.1 C8_1.1 C9_1.2 C10_1.2 C11_1.2 C12_1.1 C13_1.1 C14_1.1 C15_1.1 C16_1.1 C17_1.1 C18_1.1 C19_1.1 C20_1.1 C21_1.1 C22_1.1 C23_1.1 C24_1.1 C25_1.1 C26_1.1 C27_1.1 C28_1.1 C29_1.1 C30_1.1 C31_1.1 C32_1.2 C33_1.1 C34_1.1 C35_1.2 C36_1.2 C37_1.2 C38_1.2 C39_1.1 C40_1.1 C40_1.2 C41_1.1 C41_1.2 C42_1.1 C42_1.2 C43_1.1 C43_1.2 D1_1.1 D1_1.2 D1_1.3 D1_1.4 D1_1.5 D1_1.6 D1_1.7 D1_1.8 D1_1.9 D1_1.10 D1_1.11 D1_1.12 D1_1.13 D1_1.14 D1_1.15 D1_1.16 D1_1.17 D1_1.18 D1_1.23 D1_1.24 D1_1.25 D1_1.26 D1_1.27 D1_1.28 D1_1.29 D1_1.30 D1_1.31 D1_1.34 D1_1.35 D1_1.36 D1_1.37 D1_1.38 D1_1.39 D1_1.40 D1_1.41 D1_1.42 D1_1.43 D1_1.44 D1_1.45 D2.1 D2.2 D2.15 D2_1.1 D2_1.2 D2_1.3 D2_1.4 D2_1.5 D2_1.6 D2_1.7 D2_1.8 D2_1.10 D2_1.11 D2_1.13 D2_1.14 D2_1.15 D2_1.16 P4_1.1 P4_1.2 P5_1.1 P5_1.2 P5_1.3 P5_1.4 P5_1.5 P5_1.6 P5_1.7 P5_1.8 P5_1.9 P5_1.10 P5_1.11 P5_1.12 P5_1.13 P6_1.2 P6_1.3 R1_1.1 R1_1.2 R2_1.1 R2_1.2 R3_1.1 R3_1.2 X1_1.1 X1_1.2 X1_1.3 X2_1.1 X2_1.2 X2_1.3 X3_1.1 X3_1.2 X3_1.3 X4_1.1 X5.3 X5_1.1 X5_1.2 X5_1.3 X6.2 X6.3 X6_1.2 X6_1.3 X6_1.6 X6_1.8 X6_1.14 X6_1.15 X6_1.21 X6_1.33 X6_1.35 X6_1.36 X6_1.38 X6_1.39 X6_1.41 X6_1.42 X6_1.44
copper on no net: | length 2921.9
  Top Layer w0.127: 97.143,50.41 97.143,51.478 97.217,51.552 101.162,51.552 103.318,53.708 103.318,127.858 122.465,147.005 137.581,147.005 137.656,146.931 137.656,146.042 ; 97.143,52.95 97.143,51.883 97.217,51.809 101.056,51.809 103.061,53.814 103.061,127.964 122.358,147.262 137.581,147.262 137.656,147.336 137.656,148.277 138.303,147.629 138.303,147.553 138.646,147.21 139.416,147.21 140.715,145.911 141.364,145.911 141.438,145.985 141.438,146.031 141.515,146.107 142.05,146.107 ; 126.911,98.543 126.911,103.293 143.294,119.676 143.294,138.244 144.869,139.818 144.869,144.771 146.205,146.107 147.9,146.107 ; 129.451,98.543 129.451,103.293 145.809,119.651 145.809,143.4 146.566,144.157 147.9,144.157 ; 131.991,98.543 131.991,103.293 149.619,120.921 148.349,122.191 148.349,138.472 148.882,139.006 148.882,143.273 148.689,143.466 147.941,143.466 147.9,143.507 ; 137.656,145.991 137.656,146.042 ; 142.05,142.857 142.585,142.857 142.661,142.934 142.661,142.979 142.736,143.054 143.226,143.054 143.52,142.76 143.52,141.804 138.691,136.975 137.73,136.975 137.656,137.049 137.656,137.99 137.008,137.342 137.008,137.26 136.721,136.974 118.318,136.974 106.614,125.269 106.614,94.351 144.943,56.022 156.911,56.022 156.985,55.948 156.985,54.881 ; 142.05,143.507 142.585,143.507 142.661,143.431 142.661,143.385 142.736,143.311 143.333,143.311 143.777,142.866 143.777,141.698 138.797,136.718 137.73,136.718 137.656,136.644 137.656,135.704 137.008,136.351 137.008,136.43 136.721,136.717 118.425,136.717 106.871,125.163 106.871,94.458 145.049,56.279 156.911,56.279 156.985,56.354 156.985,57.421 ; 142.05,144.157 141.515,144.157 141.438,144.234 141.438,144.279 141.364,144.354 141.067,144.354 138.537,141.823 138.325,141.823 138.251,141.749 138.251,141.404 137.656,140.809 137.656,141.749 137.581,141.823 136.853,141.823 136.851,141.825 120.612,141.825 105.22,126.433 105.22,66.543 138.343,33.419 156.911,33.419 156.985,33.494 156.985,34.561 ; 142.05,144.807 141.515,144.807 141.438,144.731 141.438,144.685 141.364,144.611 140.961,144.611 138.43,142.08 138.325,142.08 138.251,142.155 138.251,142.5 137.656,143.095 137.656,142.155 137.581,142.08 136.959,142.08 136.958,142.082 120.506,142.082 104.963,126.539 104.963,66.437 138.237,33.162 156.911,33.162 156.985,33.088 156.985,32.021 ; 142.05,145.457 141.515,145.457 141.438,145.534 141.438,145.579 141.364,145.654 140.609,145.654 139.31,146.953 138.618,146.953 138.354,146.689 138.303,146.689 137.656,146.042
  Top Layer w0.254: 123.101,6.372 136.005,6.372 143.227,6.372 150.152,6.372 152.393,6.372 156.782,10.761 173.548,10.761 179.261,16.474 ; 128.283,13.428 129.375,12.336 129.375,9.796 ; 129.578,6.392 129.375,6.595 129.375,9.796 ; 133.363,13.428 133.363,10.278 133.846,9.796 129.375,9.796 ; 142.151,98.543 142.151,103.979 153.454,115.282 153.454,122.216 154.929,123.691 ; 144.691,98.543 144.691,103.928 157.239,116.476 157.239,120.921 ; 147.231,98.543 147.231,104.487 158.534,115.79 158.534,122.216 159.864,123.546 ; 147.9,145.457 150.051,145.457 151.346,144.162 151.346,144.111 151.93,143.527 151.981,143.527 ; 147.9,147.407 151.493,147.407 151.981,147.896
  Top Layer w0.305: 97.143,58.03 97.143,80.281 98.26,81.398 ; 128.537,86.174 132.093,86.174 145.606,72.661 156.985,72.661 ; 134.15,42.161 134.17,42.181 156.985,42.181 ; 141.669,51.209 148.872,51.209 150.279,49.801 156.985,49.801 160.008,52.823 160.008,58.894 165.062,63.949 175.756,63.949 179.261,67.454 179.261,70.754 ; 156.985,29.481 158.636,29.481 163.244,34.089 165.088,34.089 168.861,34.089 171.26,31.691 178.575,31.691 179.261,32.376 179.261,34.567 ; 156.985,47.261 162.598,52.874 162.598,55.18 165.113,57.695 166.414,58.996 177.161,58.996 179.261,61.095 ; 166.363,42.282 166.363,45.314 165.113,46.564 165.113,49.064 170.828,54.779 177.162,54.779 179.261,56.878 ; 166.363,68.724 170.503,72.864 177.154,72.864 179.261,74.971 ; 166.363,76.877 166.363,84.281 177.318,84.281 179.261,82.338 179.261,79.189
  Top Layer w0.37: 151.981,147.896 151.981,143.527 151.981,139.183 151.981,136.161 153.5,134.642 162.776,134.642 167.165,134.642 183.63,118.178 183.63,40.352 182.062,38.785 179.261,38.785 ; 179.261,24.909 182.004,22.166 182.004,5.224
  Bottom Layer w0.254: 97.143,30.09 97.193,30.141 100.114,30.141 ; 97.143,32.63 94.018,35.755 94.018,82.186 98.006,86.174 125.997,86.174 ; 97.143,35.17 99.556,35.17 100.114,34.612 ; 97.143,37.71 99.84,37.71 100.114,37.436 ; 97.143,40.25 97.153,40.261 100.114,40.261 ; 97.143,42.79 99.82,42.79 100.114,43.085 ; 97.143,45.33 99.535,45.33 100.114,45.91 ; 97.143,47.87 99.251,47.87 99.479,48.099 99.479,48.15 100.063,48.734 100.114,48.734 ; 100.114,58.157 100.114,68.648 100.8,69.333 100.8,81.398 ; 102.4,58.157 103.95,58.157 104.61,57.497 104.61,41.063 103.808,40.261 102.4,40.261 102.4,37.436 102.4,34.612 120.663,34.612 130.823,24.452 130.823,16.527 130.823,13.428 133.236,11.015 152.997,11.015 157.671,15.689 164.478,15.689 164.478,20.382 169.132,20.382 170.93,18.584 177.154,18.584 179.261,20.691 ; 114.059,123.461 114.059,126.636 115.227,127.804 136.233,127.804 138.164,125.874 138.164,117.746 139.611,116.298 139.611,98.543 139.611,74.591 143.193,71.01 143.193,64.634 143.193,35.805 140.983,33.596 140.983,13.428 ; 116.599,123.461 116.599,125.417 117.869,126.687 133.947,126.687 135.573,125.061 135.573,117.695 137.071,116.196 137.071,98.543 137.071,75.379 138.443,74.007 138.443,64.634 138.443,13.428 ; 122.746,16.298 123.203,15.841 123.203,13.428 ; 124.206,123.473 123,122.267 123,107.256 126.911,103.344 126.911,98.543 ; 125.591,16.298 125.591,13.58 125.743,13.428 ; 126.759,120.921 126.759,106.113 129.451,103.42 129.451,98.543 ; 134.379,120.921 134.379,98.696 134.531,98.543 134.531,73.88 135.903,72.508 135.903,64.634 135.903,13.428 ; 142.151,98.543 142.151,75.506 148.044,69.613 148.044,64.634 148.044,35.907 143.523,31.386 143.523,13.428 ; 144.691,98.786 144.691,98.543 144.691,75.455 148.806,71.34 148.806,42.891 152.057,39.641 156.985,39.641 ; 147.231,98.543 147.231,75.201 149.594,72.839 149.594,61.84 151.473,59.961 156.985,59.961 ; 152.159,120.921 152.159,98.696 152.311,98.543 152.311,76.039 151.372,75.099 151.372,65.904 152.235,65.041 156.985,65.041 ; 152.319,123.621 150.889,122.191 150.889,117.67 149.771,116.552 149.771,98.543 149.771,77.233 150.508,76.496 150.508,63.618 151.626,62.501 156.985,62.501 ; 156.985,67.581 153.251,67.581 152.388,68.444 152.388,74.21 154.851,76.674 154.851,98.543 154.851,113.682 159.779,118.609 159.779,120.921 ; 156.985,70.121 154.572,70.121 153.277,71.416 153.277,73.372 157.391,77.487 157.391,98.543 157.391,114.266 161.1,117.974 161.1,122.242 162.319,123.461
  Bottom Layer w0.305: 97.143,55.49 99.886,55.49 100.114,55.262 ; 97.143,58.03 97.27,58.157 ; 153.988,29.481 156.985,29.481 ; 153.988,41.825 154.343,42.181 156.985,42.181 159.246,44.441 171.042,44.441 179.261,52.66 ; 153.988,44.67 154.039,44.721 156.985,44.721 160.744,48.48 160.744,63.105 166.363,68.724 ; 153.988,47.515 156.209,47.515 156.234,47.489 156.756,47.489 156.985,47.261 ; 154.006,53.154 156.172,53.154 156.985,52.341 159.398,54.754 159.398,69.912 166.363,76.877 ; 154.013,37.075 161.156,37.075 166.363,42.282 ; 154.013,50.334 156.209,50.334 156.742,49.801 156.985,49.801

## Polygon pours and split planes (outlines as drawn)
GND on Top Layer "GND_L01_P000" (solid, pour order 0): 0,150 0,0 185,0 185,150
GND on Bottom Layer "GND_L02_P001" (solid, pour order 1): 0,150 0,0 185,0 185,150

## Keep-outs
Keep-Out Layer:
  the board outline again, w0.254

## Other copper
Multi-Layer:
  pour cut-out: 28,150 28,140 18,140 18,150
  pour cut-out: 168,150 168,140 158,140 158,150
  pour cut-out: 168,10 168,0 158,0 158,10
  pour cut-out: 28,10 28,0 18,0 18,10

## Silkscreen, mask and mechanical layers (free items; w line width, h text height)
Top Overlay:
  lines w0.254: 92.5,0 92.5,144 92.5,150
  text "+" at 11.453,144.23 h1
  text "GMAX0505/2518 / Channel B" at 129.365,112.396 h1.52
  text "CLKOUT" at 127.485,100.328 h1 r90
  text "OUTT0" at 130.025,100.328 h1 r90
  text "OUTB0" at 132.641,100.328 h1 r90
  text "SPI_OUT" at 135.065,100.328 h1 r90
  text "SPI_EN" at 137.656,100.328 h1 r90
  text "CLK_REF" at 140.145,100.328 h1 r90
  text "TEXP1" at 142.623,100.328 h1 r90
  text "TEXP0" at 145.24,100.328 h1 r90
  text "SPI_CLK" at 147.816,100.328 h1 r90
  text "TDIG0" at 150.396,100.328 h1 r90
  text "TDIG1" at 152.758,100.328 h1 r90
  text "SPI_IN" at 155.385,100.328 h1 r90
  text "SYS_RST_N" at 157.875,100.328 h1 r90
  text "p" at 123.645,86.03 h1
  text "N" at 130.35,85.723 h1
  text "2518" at 95.989,83.462 h1 r90
  text "0505" at 101.247,83.208 h1 r90
  text "p" at 61.135,63.678 h1
  text "2518" at 90.147,63.396 h1 r90
  text "N" at 54.303,63.345 h1
  text "0505" at 85.016,63.167 h1 r90
  text "TDIG1" at 33.5,45.619 h1 r90
  text "TEXP1" at 43.613,45.452 h1 r90
  text "TDIG0" at 35.986,45.286 h1 r90
  text "TEXP0" at 41.126,45.119 h1 r90
  text "OUTB0" at 53.825,45.108 h1 r90
  text "OUTT0" at 56.416,45.108 h1 r90
  text "SPI_IN" at 31.013,44.452 h1 r90
  text "SPI_EN" at 48.705,44.295 h1 r90
  text "CLKOUT" at 58.956,44.117 h1 r90
  text "SPI_CLK" at 38.64,43.286 h1 r90
  text "SPI_OUT" at 51.245,43.279 h1 r90
  text "CLK_REF" at 46.266,43.12 h1 r90
  text "SYS_RST_N" at 28.36,41.12 h1 r90
  text "GMAX0505/2518 / Channel A" at 37.341,33.3 h1.52
  text "+" at 173.853,5.774 h1 r180

## Text inside footprints (layer, text, board x,y; h text height)
C8: Bottom Overlay "-" at 23.191,17.479 h1 r225
C8_1: Bottom Overlay "-" at 162.115,132.524 h1 r45
C12: Bottom Overlay "-" at 36.315,146.249 h1 r225
C12_1: Bottom Overlay "-" at 148.991,3.754 h1 r45
C13: Bottom Overlay "-" at 43.24,146.249 h1 r225
C13_1: Bottom Overlay "-" at 142.066,3.754 h1 r45
C14: Bottom Overlay "-" at 49.962,145.749 h1 r225
C14_1: Bottom Overlay "-" at 135.344,4.254 h1 r45
C15: Bottom Overlay "-" at 56.389,145.729 h1 r225
C15_1: Bottom Overlay "-" at 128.917,4.274 h1 r45
C16: Bottom Overlay "-" at 62.866,145.749 h1 r225
C16_1: Bottom Overlay "-" at 122.44,4.254 h1 r45
C19: Bottom Overlay "-" at 21.719,120.582 h1 r270
C19_1: Bottom Overlay "-" at 163.587,29.422 h1 r90
C21: Bottom Overlay "-" at 21.989,136.933 h1 r225
C21_1: Bottom Overlay "-" at 163.317,13.071 h1 r45
C22: Bottom Overlay "-" at 20.167,127.504 h1 r45
C22_1: Bottom Overlay "-" at 165.139,22.5 h1 r225
C24: Bottom Overlay "-" at 21.561,80.119 h1 r135
C24_1: Bottom Overlay "-" at 163.745,69.885 h1 r315
C26: Bottom Overlay "-" at 45.843,109.961 h1 r225
C26_1: Bottom Overlay "-" at 139.463,40.043 h1 r45
C27: Bottom Overlay "-" at 39.87,109.961 h1 r225
C27_1: Bottom Overlay "-" at 145.436,40.043 h1 r45
C28: Bottom Overlay "-" at 51.817,109.961 h1 r225
C28_1: Bottom Overlay "-" at 133.489,40.043 h1 r45
C30: Bottom Overlay "-" at 19.532,98.822 h1 r45
C30_1: Bottom Overlay "-" at 165.774,51.182 h1 r225
C31: Bottom Overlay "-" at 21.061,107.06 h1 r135
C31_1: Bottom Overlay "-" at 164.245,42.943 h1 r315
C33: Bottom Overlay "-" at 44.798,101.413 h1 r225
C33_1: Bottom Overlay "-" at 140.508,48.591 h1 r45
C35: Bottom Overlay "-" at 19.325,66.384 h1 r315
C35_1: Bottom Overlay "-" at 165.981,83.62 h1 r135
C36: Bottom Overlay "-" at 19.325,73.788 h1 r315
C36_1: Bottom Overlay "-" at 165.981,76.216 h1 r135
C38: Bottom Overlay "-" at 21.354,92.427 h1 r225
C38_1: Bottom Overlay "-" at 163.952,57.577 h1 r45
D1: Top Overlay "VPBN" at 62.679,131.19 h1 r90; Top Overlay "G" at 37.228,134.185 h1 r90; Top Overlay "G" at 39.794,134.185 h1 r90; Top Overlay "TEXP1" at 42.308,130.524 h1 r90; Top Overlay "CLK_REF" at 44.765,128.191 h1 r90; Top Overlay "SPI_EN" at 47.33,129.357 h1 r90; Top Overlay "SPI_OUT" at 49.896,128.358 h1 r90; Top Overlay "VDD13D" at 52.494,129.357 h1 r90; Top Overlay "VDD33A" at 54.881,129.191 h1 r90; Top Overlay "VDD13AD" at 57.574,128.358 h1 r90; Top Overlay "VCLBN" at 60.088,130.19 h1 r90; Top Overlay "G" at 30.069,125.103 h1; Top Overlay "G" at 30.069,122.538 h1; Top Overlay "OUTT0_N" at 30.069,117.49 h1; Top Overlay "OUTT0_P" at 30.069,114.95 h1; Top Overlay "VDDCL" at 30.069,112.327 h1; Top Overlay "TEXP0" at 30.069,109.838 h1; Top Overlay "VDDIO" at 30.069,107.323 h1; Top Overlay "VTXH" at 30.069,104.758 h1; Top Overlay "VTXL" at 30.069,102.243 h1; Top Overlay "VG_RSTH" at 30.069,99.634 h1; Top Overlay "VGRSTL" at 30.069,97.138 h1; Top Overlay "OUTB0_N" at 30.069,94.63 h1; Top Overlay "OUTB0_P" at 30.069,92.065 h1; Top Overlay "SPI_CLK" at 30.076,89.55 h1; Top Overlay "TDIG0" at 30.06,87.003 h1; Top Overlay "TDIG1" at 30.074,84.438 h1; Top Overlay "IN" at 30.06,81.949 h1; Top Overlay "RST" at 30.069,79.383 h1; Top Overlay "VDN" at 30.069,76.792 h1; Top Overlay "VPBP" at 82.81,91.423 h1; Top Overlay "VCBN" at 82.81,94.039 h1; Top Overlay "CLKOUT_P" at 78.811,96.459 h1; Top Overlay "CLKOUT_N" at 78.811,99.024 h1; Top Overlay "VRF" at 83.81,101.735 h1; Top Overlay "VRS" at 83.81,104.275 h1; Top Overlay "VREF" at 82.81,106.764 h1; Top Overlay "VCIBP" at 81.977,109.254 h1; Top Overlay "VRCP" at 82.81,111.844 h1; Top Overlay "VRBP" at 82.81,114.359 h1; Top Overlay "VDP" at 83.81,116.899 h1; Top Overlay "VCLPCN" at 80.811,119.414 h1; Top Overlay "G" at 85.809,122.042 h1; Top Overlay "G" at 85.809,124.57 h1; Top Overlay "VDDPIX" at 30.042,119.998 h1
D1_1: Top Overlay "VDDPIX" at 149.765,29.006 h1; Top Overlay "G" at 98.83,24.434 h1; Top Overlay "G" at 98.83,26.962 h1; Top Overlay "VCLPCN" at 98.83,29.591 h1; Top Overlay "VDP" at 98.83,32.105 h1; Top Overlay "VRBP" at 98.83,34.645 h1; Top Overlay "VRCP" at 98.83,37.16 h1; Top Overlay "VCIBP" at 98.83,39.751 h1; Top Overlay "VREF" at 98.83,42.24 h1; Top Overlay "VRS" at 98.83,44.729 h1; Top Overlay "VRF" at 98.83,47.269 h1; Top Overlay "CLKOUT_N" at 98.83,50.146 h1; Top Overlay "CLKOUT_P" at 98.83,52.712 h1; Top Overlay "VCBN" at 98.83,54.965 h1; Top Overlay "VPBP" at 98.83,57.581 h1; Top Overlay "VDN" at 152.571,72.212 h1; Top Overlay "RST" at 152.571,69.621 h1; Top Overlay "IN" at 153.746,67.056 h1; Top Overlay "TDIG1" at 151.067,64.566 h1; Top Overlay "TDIG0" at 150.748,62.001 h1; Top Overlay "SPI_CLK" at 148.732,59.62 h1; Top Overlay "OUTB0_P" at 148.573,57.106 h1; Top Overlay "OUTB0_N" at 148.573,54.54 h1; Top Overlay "VGRSTL" at 149.572,51.866 h1; Top Overlay "VG_RSTH" at 148.573,49.537 h1; Top Overlay "VTXL" at 151.572,46.761 h1; Top Overlay "VTXH" at 151.572,44.246 h1; Top Overlay "VDDIO" at 150.739,41.681 h1; Top Overlay "TEXP0" at 150.572,39.166 h1; Top Overlay "VDDCL" at 150.572,36.677 h1; Top Overlay "OUTT0_P" at 148.573,34.22 h1; Top Overlay "OUTT0_N" at 148.573,31.68 h1; Top Overlay "G" at 154.571,26.466 h1; Top Overlay "G" at 154.571,23.901 h1; Top Overlay "VCLBN" at 126.217,15.148 h1 r90; Top Overlay "VDD13AD" at 128.732,15.148 h1 r90; Top Overlay "VDD33A" at 131.424,15.148 h1 r90; Top Overlay "VDD13D" at 133.812,15.148 h1 r90; Top Overlay "SPI_OUT" at 136.243,15.148 h1 r90; Top Overlay "SPI_EN" at 138.809,15.148 h1 r90; Top Overlay "CLK_REF" at 141.374,15.148 h1 r90; Top Overlay "TEXP1" at 143.997,15.148 h1 r90; Top Overlay "G" at 146.512,15.152 h1 r90; Top Overlay "G" at 149.077,15.152 h1 r90; Top Overlay "VPBN" at 123.627,15.148 h1 r90